# EAGLE board SHIELD_MCU_DDS_1_3 (EAGLE 6.1)
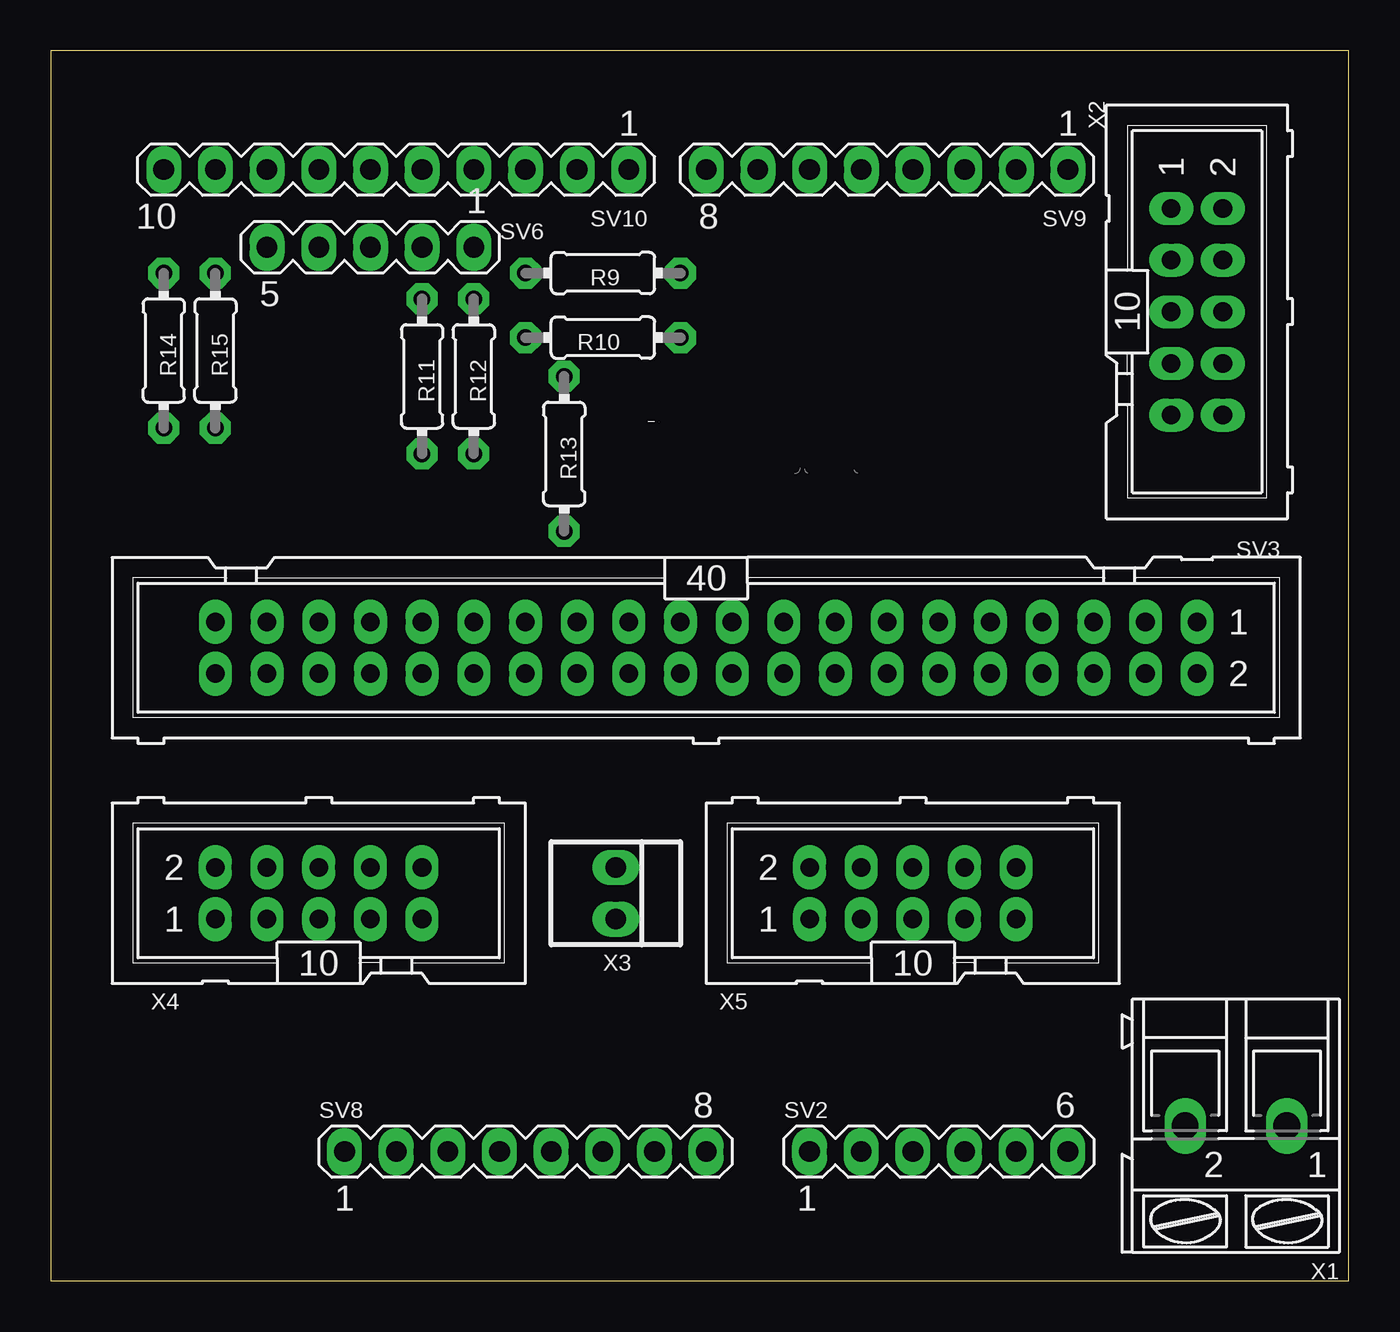
[diagram p0: board, top side]
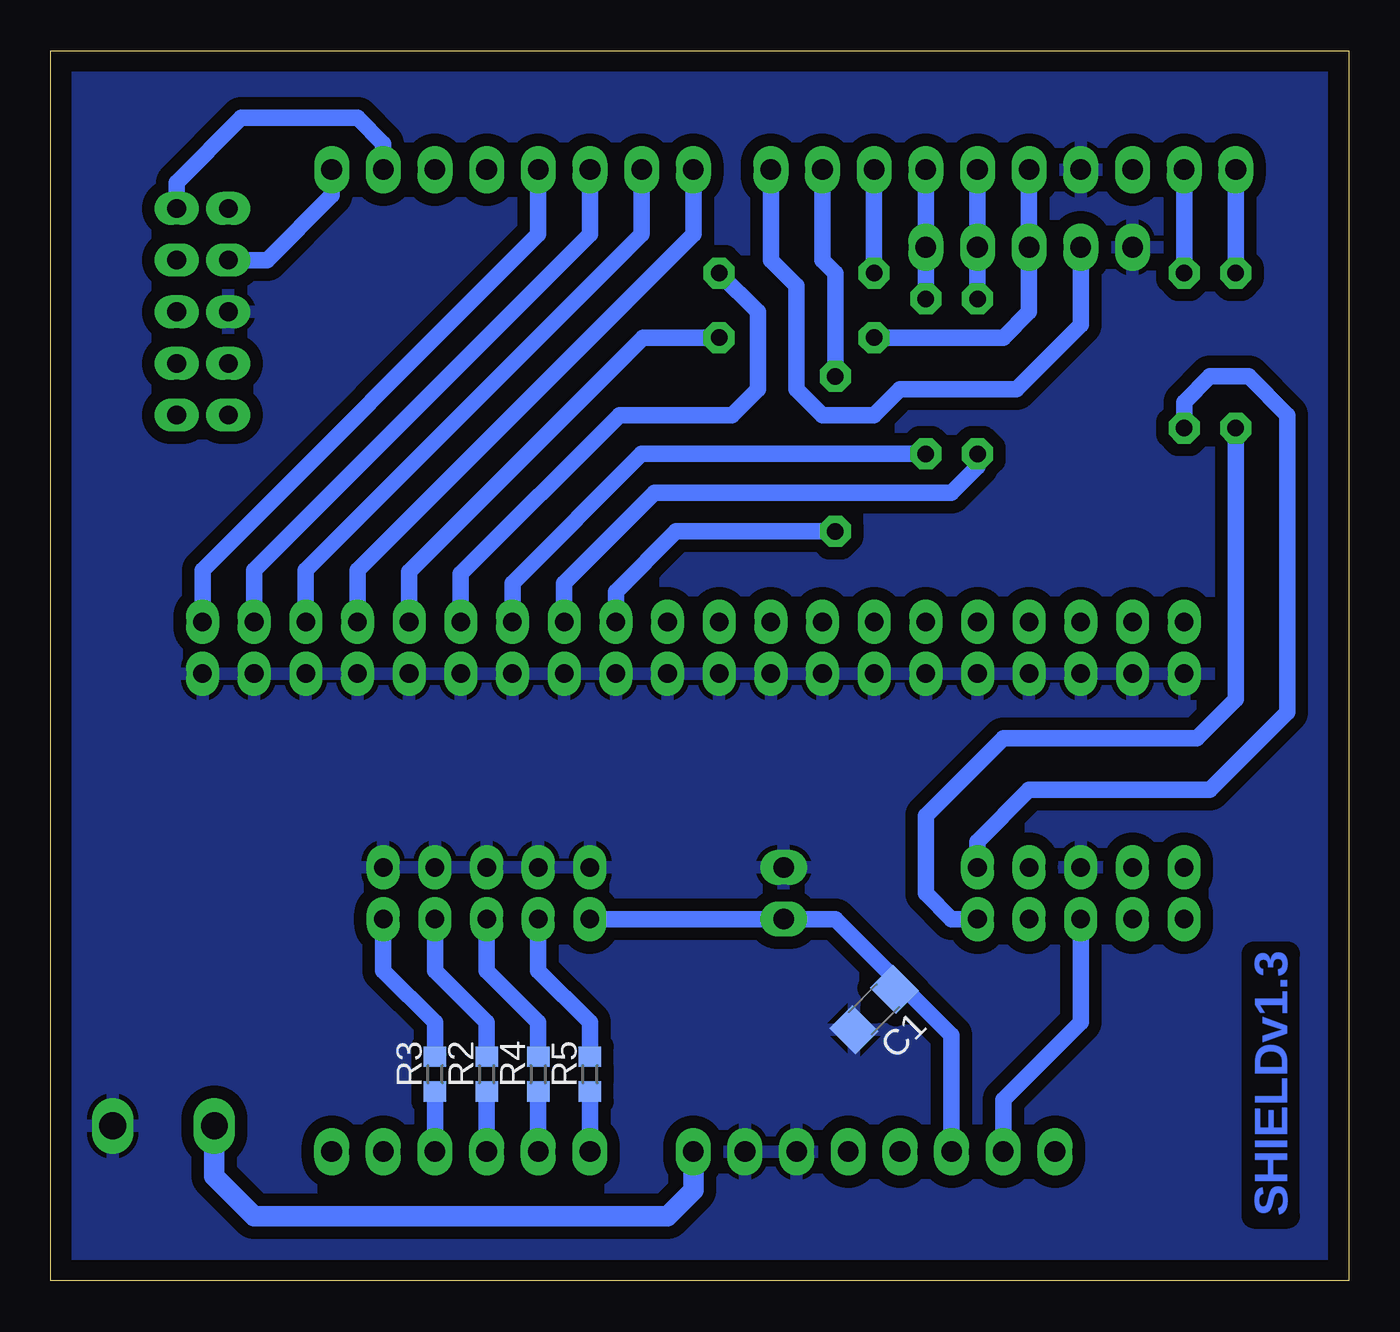
[diagram p1: board, bottom side, seen from below]

Size 63.8 x 60.44 mm. Coordinates in mm from the lower left corner, seen from the top.
Outline: 0,0 63.8,0 63.8,60.44 0,60.44 0,0
Copper layers (1*16): Top 0.035mm / dielectric 1.5mm / Bottom 0.035mm
Design rules: minimum track width 10mil, minimum drill 20mil, track to track 8mil, track to pad 8mil, pad to pad 8mil, via to via 8mil, smd to smd 8mil, copper to edge 40mil, drill to drill 8mil, minimum pad ring 14mil, minimum via ring 8mil, stop-mask expansion 4mil, vias tented up to drill 0mil, thermal gap 10mil

## Footprints (pad centres in the part's own frame; a part is rotated, then mirrored left to right if it is on the bottom)
C1206 = smd 1.6 x 1.8: 1 -1.4,0; 2 1.4,0
R0603 = smd 1 x 1.1: 1 -0.85,0; 2 0.85,0
0204/7 = drill 0.813 octagon: 1 -3.81,0; 2 3.81,0
MA06-1 = drill 1.016 long: 1 -6.35,0; 2 -3.81,0; 3 -1.27,0; 4 1.27,0; 5 3.81,0; 6 6.35,0
ML40 = drill 0.914 pad 1.524 long: 1 -24.13,-1.27; 2 -24.13,1.27; 3 -21.59,-1.27; 4 -21.59,1.27; 5 -19.05,-1.27; 6 -19.05,1.27; 7 -16.51,-1.27; 8 -16.51,1.27; 9 -13.97,-1.27; 10 -13.97,1.27; 11 -11.43,-1.27; 12 -11.43,1.27; 13 -8.89,-1.27; 14 -8.89,1.27; 15 -6.35,-1.27; 16 -6.35,1.27; 17 -3.81,-1.27; 18 -3.81,1.27; 19 -1.27,-1.27; 20 -1.27,1.27; 21 1.27,-1.27; 22 1.27,1.27; 23 3.81,-1.27; 24 3.81,1.27; 25 6.35,-1.27; 26 6.35,1.27; 27 8.89,-1.27; 28 8.89,1.27; 29 11.43,-1.27; 30 11.43,1.27; 31 13.97,-1.27; 32 13.97,1.27; 33 16.51,-1.27; 34 16.51,1.27; 35 19.05,-1.27; 36 19.05,1.27; 37 21.59,-1.27; 38 21.59,1.27; 39 24.13,-1.27; 40 24.13,1.27
MA05-1 = drill 1.016 long: 1 -5.08,0; 2 -2.54,0; 3 0,0; 4 2.54,0; 5 5.08,0
MA08-1 = drill 1.016 long: 1 -8.89,0; 2 -6.35,0; 3 -3.81,0; 4 -1.27,0; 5 1.27,0; 6 3.81,0; 7 6.35,0; 8 8.89,0
MA10-1 = drill 1.016 long: 1 -11.43,0; 2 -8.89,0; 3 -6.35,0; 4 -3.81,0; 5 -1.27,0; 6 1.27,0; 7 3.81,0; 8 6.35,0; 9 8.89,0; 10 11.43,0
AK300/2 = drill 1.321 long: 1 -2.515,0; 2 2.489,0
ML10 = drill 0.914 pad 1.524 long: 1 -5.08,-1.27; 2 -5.08,1.27; 3 -2.54,-1.27; 4 -2.54,1.27; 5 0,-1.27; 6 0,1.27; 7 2.54,-1.27; 8 2.54,1.27; 9 5.08,-1.27; 10 5.08,1.27
22-23-2021 = drill 1 long: 1 -1.27,0; 2 1.27,0

## Placement (x,y rotation side)
C1  NC  [C1206]  23.33,13.33 225 bottom
R2  330  [R0603]  42.38,10.16 90 bottom
R3  330  [R0603]  44.92,10.16 90 bottom
R4  330  [R0603]  39.84,10.16 90 bottom
R5  330  [R0603]  37.3,10.16 90 bottom
R9  100  [0204/7]  27.14,49.53 0 top
R10  100  [0204/7]  27.14,46.35 0 top
R11  100  [0204/7]  18.25,44.45 270 top
R12  100  [0204/7]  20.79,44.45 270 top
R13  100  [0204/7]  25.23,40.64 270 top
R14  100  [0204/7]  5.55,45.72 270 top
R15  100  [0204/7]  8.09,45.72 270 top
SV2  [MA06-1]  43.65,6.35 0 top
SV3  [ML40]  32.22,31.11 180 top
SV6  NC  [MA05-1]  15.71,50.8 180 top
SV8  [MA08-1]  23.33,6.35 0 top
SV9  [MA08-1]  41.11,54.61 180 top
SV10  [MA10-1]  16.98,54.61 180 top
U$1  [JICA_LOGO1]  38.57,40.64 0 top
X1  [AK300/2]  58.26,7.62 180 top
X2  [ML10]  56.35,47.62 270 top
X3  NC  [22-23-2021]  27.78,19.05 270 top
X4  [ML10]  13.17,19.05 0 top
X5  [ML10]  42.38,19.05 0 top

## Library data of the parts
C1 R2-R5 R9-R15 = rcl
SV2 SV6 SV8-SV10 = con-lstb; OC_FARNELL: unknown; OC_NEWARK: unknown
SV3 X2 X4 X5 = con-harting-ml; OC_FARNELL: unknown; OC_NEWARK: unknown
U$1 = Jica_Logos
X1 = con-ptr500; OC_FARNELL: unknown; OC_NEWARK: unknown
X3 = con-molex; MF: MOLEX; MPN: 22-23-2021; OC_FARNELL: 1462926; OC_NEWARK: 25C3832

## Nets
3V3: SV8.4
5V: SV8.5
+3V3: SV8.2 X4.5
ADDR3: SV3.19
ADDR4: SV3.21
ADDR5: SV3.23
AREF: SV10.8
CTS: X2.8
D0: SV3.25
D0_PTC16_RXD: SV9.1 X2.3
D1: SV3.27
D1_PTC17_TXD: SV9.2 X2.2
D2: SV3.29
D2_PTB9: SV9.3
D3: SV3.31
D3_PTA1: SV9.4
D4: SV3.33
D4_PTB23_MRESET: SV3.1 SV9.5
D5: SV3.35
D5_PTA2_OUTRAMP: SV3.3 SV9.6
D6: SV3.37
D6_PTC2_SP_MODE: SV3.5 SV9.7
D7: SV3.39
D7_PTC3_CS: SV3.7 SV9.8
D8_PTA0: SV6.4 SV10.1
D9_PTC4_IO_RESET: R13.2 SV3.17
D9_PTC4_IO_RESET_R: R13.1 SV10.2
D10_PTD0_UPD_CLK: R9.2 SV3.11
D10_PTD0_UPD_CLK_R: R9.1 SV10.3
D11_PTD2_MOSI: R12.2 SV3.13
D11_PTD2_MOSI_R: R12.1 SV6.1 SV10.4
D12_PTD3_MISO: R11.2 SV3.15
D12_PTD3_MISO_R: R11.1 SV6.2 SV10.5
D13_PTD1_SCK: R10.2 SV3.9
D13_PTD1_SCK_R: R10.1 SV6.3 SV10.6
D14_PTE25_SDA: R15.1 SV10.9
D15_PTE24_SCL: R14.1 SV10.10
GND: C1.2 SV3.2 SV3.4 SV3.6 SV3.8 SV3.10 SV3.12 SV3.14 SV3.16 SV3.18 SV3.20 SV3.22 SV3.24 SV3.26 SV3.28 SV3.30 SV3.32 SV3.34 SV3.36 SV3.38 SV3.40 SV6.5 SV8.6 SV8.7 SV10.7 X1.1 X2.5 X3.1 X4.6 X5.2 X5.4 X5.6 X5.8 X5.10
N$1: R2.2 X5.7
N$2: R4.2 X5.5
N$3: R5.2 X5.3
N$5: SV2.5
N$6: R3.2 X5.9
PTB2: R5.1 SV2.1
PTB3: R4.1 SV2.2
PTB10: R2.1 SV2.3
PTB11: R3.1 SV2.4
PTC10: SV2.6
RST: C1.1 SV8.3 X3.2 X5.1
RTS: X2.7
SCL: R14.2 X4.9
SDA: R15.2 X4.10
VIN: SV8.8 X1.2

## Tracks (layer width: path | path; a pad name or v marks a point on that pad's centre or on a via)
+3V3
  Bottom 0.813: X4.5 13.17,12.7 16.98,8.89 SV8.2
D0_PTC16_RXD
  Bottom 0.813: SV9.1 50,53.34 53.17,50.16 X2.3
D1_PTC17_TXD
  Bottom 0.813: SV9.2 47.46,55.88 48.73,57.15 54.45,57.15 57.62,53.97 X2.2
D4_PTB23_MRESET
  Bottom 0.813: SV3.1 56.35,34.92 39.84,51.43 SV9.5
D5_PTA2_OUTRAMP
  Bottom 0.813: SV3.3 53.81,34.92 37.3,51.43 SV9.6
D6_PTC2_SP_MODE
  Bottom 0.813: SV3.5 51.27,34.92 34.76,51.43 SV9.7
D7_PTC3_CS
  Bottom 0.813: SV3.7 48.73,34.92 32.22,51.43 SV9.8
D8_PTA0
  Bottom 0.813: SV10.1 28.41,50.16 27.14,48.89 27.14,43.81 25.87,42.54 23.33,42.54 22.06,43.81 16.35,43.81 13.17,46.98 SV6.4
D9_PTC4_IO_RESET
  Bottom 0.813: SV3.17 36.03,33.87 33.07,36.83 R13.2
D9_PTC4_IO_RESET_R
  Bottom 0.813: SV10.2 25.87,50.16 25.23,49.53 R13.1
D10_PTD0_UPD_CLK
  Bottom 0.813: SV3.11 43.65,34.74 35.85,42.54 30.32,42.54 29.04,43.81 29.04,47.62 R9.2
D10_PTD0_UPD_CLK_R
  Bottom 0.813: SV10.3 R9.1
D11_PTD2_MOSI
  Bottom 0.813: SV3.13 41.11,34.29 34.76,40.64 R12.2
D11_PTD2_MOSI_R
  Bottom 0.813: SV10.4 SV6.1 20.79,50.16 R12.1
D12_PTD3_MISO
  Bottom 0.813: SV3.15 38.57,34.29 34.12,38.73 19.52,38.73 18.25,40 R11.2
D12_PTD3_MISO_R
  Bottom 0.813: SV10.5 SV6.2 R11.1
D13_PTD1_SCK
  Bottom 0.813: SV3.9 46.19,34.85 34.69,46.35 R10.2
D13_PTD1_SCK_R
  Bottom 0.813: R10.1 16.98,46.35 15.71,47.62 SV6.3 SV10.6
D14_PTE25_SDA
  Bottom 0.813: SV10.9 R15.1
D15_PTE24_SCL
  Bottom 0.813: SV10.10 R14.1
GND
  pour Bottom (isolate 0.61): -0.17,60.32 -0.17,0 63.97,0 63.97,60.32
N$1
  Bottom 0.813: R2.2 42.38,12.7 44.92,15.24 X5.7
N$2
  Bottom 0.813: R4.2 39.84,12.7 42.38,15.24 X5.5
N$3
  Bottom 0.813: R5.2 37.3,12.7 39.84,15.24 X5.3
N$6
  Bottom 0.813: R3.2 44.92,12.7 47.46,15.24 X5.9
PTB2
  Bottom 0.813: R5.1 SV2.1
PTB3
  Bottom 0.813: R4.1 SV2.2
PTB10
  Bottom 0.813: R2.1 SV2.3
PTB11
  Bottom 0.813: R3.1 SV2.4
RST
  Bottom 0.813: X5.1 X3.2 25.23,17.78 19.52,12.06 | 19.52,12.06 19.52,9.52 SV8.3 | C1.1 21.78,14.32 19.52,12.06
SCL
  Bottom 0.813: R14.2 5.55,28.57 7.46,26.67 16.98,26.67 20.79,22.86 20.79,19.05 19.52,17.78 X4.9
SDA
  Bottom 0.813: X4.10 18.25,21.59 15.71,24.12 6.82,24.12 3.01,27.94 3.01,42.54 4.92,44.45 6.82,44.45 8.09,43.17 R15.2
VIN
  Bottom 1.016: SV8.8 32.22,4.44 33.49,3.17 53.81,3.17 55.77,5.13 X1.2

## Text on the board
Bottom: SHIELDv1.3
tDocu: UART | I2C | IO EXPANSION | VCC | GND